# EAGLE board CT_schematic (EAGLE 7.6.0)

Size 100 x 80 mm. Coordinates in mm from the lower left corner, seen from the top.
Outline: 0,0 100,0 100,80 0,80 0,0
Copper layers (1*16): Top 0.035mm / dielectric 1.5mm / Bottom 0.035mm
Design rules "default": minimum track width 10mil, minimum drill 24mil, track to track 8mil, track to pad 8mil, pad to pad 8mil, via to via 8mil, smd to smd 8mil, copper to edge 40mil, drill to drill 8mil, minimum pad ring 10mil, minimum via ring 8mil, stop-mask expansion 4mil, vias tented up to drill 0mil, thermal gap 10mil

## Footprints (pad centres in the part's own frame; a part is rotated, then mirrored left to right if it is on the bottom)
C0603 = smd 0.8 x 0.8: 1 -0.762,0; 2 0.762,0
C0402 = smd 0.5 x 0.5: 1 -0.508,0; 2 0.508,0
C0805 = smd 1.2 x 1.3: 1 -1.016,0; 2 1.016,0
C1206 = smd 1.3 x 1.6: 1 -1.524,0; 2 1.524,0
L0603 = smd 0.8 x 0.8: 1 -0.762,0; 2 0.762,0
WE-HCI_7030/7040/7050 = smd 2.5 x 3: 1 -2.45,0; 2 2.45,0
R0603 = smd 0.8 x 0.8: 1 -0.762,0; 2 0.762,0
LQFP48 = smd 0.3 x 1.2: 1 -2.75,-4.25; 2 -2.25,-4.25; 3 -1.75,-4.25; 4 -1.25,-4.25; 5 -0.75,-4.25; 6 -0.25,-4.25; 7 0.25,-4.25; 8 0.75,-4.25; 9 1.25,-4.25; 10 1.75,-4.25; 11 2.25,-4.25; 12 2.75,-4.25; 25 2.75,4.25; 26 2.25,4.25; 27 1.75,4.25; 28 1.25,4.25; 29 0.75,4.25; 30 0.25,4.25; 31 -0.25,4.25; 32 -0.75,4.25; 33 -1.25,4.25; 34 -1.75,4.25; 35 -2.25,4.25; 36 -2.75,4.25 | smd 1.2 x 0.3: 13 4.25,-2.75; 14 4.25,-2.25; 15 4.25,-1.75; 16 4.25,-1.25; 17 4.25,-0.75; 18 4.25,-0.25; 19 4.25,0.25; 20 4.25,0.75; 21 4.25,1.25; 22 4.25,1.75; 23 4.25,2.25; 24 4.25,2.75; 37 -4.25,2.75; 38 -4.25,2.25; 39 -4.25,1.75; 40 -4.25,1.25; 41 -4.25,0.75; 42 -4.25,0.25; 43 -4.25,-0.25; 44 -4.25,-0.75; 45 -4.25,-1.25; 46 -4.25,-1.75; 47 -4.25,-2.25; 48 -4.25,-2.75
QFN-32 = smd 0.6 x 0.3: 1 -2.3,1.75; 2 -2.3,1.25; 3 -2.3,0.75; 4 -2.3,0.25; 5 -2.3,-0.25; 6 -2.3,-0.75; 7 -2.3,-1.25; 8 -2.3,-1.75; 17 2.3,-1.75; 18 2.3,-1.25; 19 2.3,-0.75; 20 2.3,-0.25; 21 2.3,0.25; 22 2.3,0.75; 23 2.3,1.25; 24 2.3,1.75 | smd 0.3 x 0.6: 9 -1.75,-2.3; 10 -1.25,-2.3; 11 -0.75,-2.3; 12 -0.25,-2.3; 13 0.25,-2.3; 14 0.75,-2.3; 15 1.25,-2.3; 16 1.75,-2.3; 25 1.75,2.3; 26 1.25,2.3; 27 0.75,2.3; 28 0.25,2.3; 29 -0.25,2.3; 30 -0.75,2.3; 31 -1.25,2.3; 32 -1.75,2.3 | smd 3.2 x 3.2: EXP 0,0
SJ-43515TS-SMT-TR = smd 2.2 x 3: 1 0.6,-7.4; 4 3.4,-7.4 | smd 3 x 3: 2 12.8,-7.4; 5 17,-3 | smd 2 x 3: 3 5.3,0; 6 2.5,0 | drill 1.8: P$7 4.5,-3.69; P$8 11.54,-3.69
WM-64PC = drill 0.6 pad 1: 1 -1,0.95; 2 -1,-0.95
ABLS-25.000MHZ-B2F-T = smd 5.6 x 2.8: 1 -3.81,0; 2 5.69,0
ASEK = smd 1.4 x 1: 1 -1.1,-0.8; 2 1.1,-0.8; 3 1.1,0.8; 4 -1.1,0.8
ASFL1 = smd 1.7 x 1.5: 1 -1.27,-1.1; 2 1.27,-1.1; 3 1.27,1.1; 4 -1.27,1.1
WSON-8 = smd 0.3 x 0.6: 1 -0.75,0; 2 0.05,0; 3 0.85,0; 4 1.65,0; 5 1.65,3.8; 6 0.85,3.8; 7 0.05,3.8; 8 -0.75,3.8 | smd 3 x 2.6: PAD 0.45,1.9
TSOT-23-5 = smd 1.3 x 0.62: 1 -1.31,0.95; 2 -1.31,0; 3 -1.31,-0.95; 4 1.31,-0.95; 5 1.31,0.95
DFN8_2X3MC = smd 0.813 x 0.305: 1 -1.398,0.75; 2 -1.398,0.25; 3 -1.398,-0.25; 4 -1.398,-0.75; 5 1.398,-0.75; 6 1.398,-0.25; 7 1.398,0.25; 8 1.398,0.75 | smd 1.753 x 1.549: 9 0,0
JST-2-SMD = smd 1 x 4.6: 1 -1,-3.7; 2 1,-3.7 | smd 1.6 x 3.4: NC1 -3.4,1.5; NC2 3.4,1.5
FCI_10118193-0001LF = smd 0.4 x 1.35: 1 -1.3,2.675; 2 -0.65,2.675; 3 0,2.675; 4 0.65,2.675; 5 1.3,2.675 | smd 1.6 x 1.4: 6 -3.2,2.45; 7 3.2,2.45 | smd 1.9 x 1.9: 8 -1.2,0; 9 1.2,0 | hole 0.5: -3.3,0; 3.3,0
SON-6 = smd 0.55 x 0.3: 1 -0.355,0.5 | smd 0.52 x 0.3: 2 -0.37,0; 3 -0.37,-0.5; 4 0.37,-0.5; 5 0.37,0; 6 0.37,0.5
SW_4-1437565-2 = smd 1.4 x 2.1: 1 -2.23,4.55; 2 -2.23,-4.55; 3 2.23,4.55; 4 2.23,-4.55
LGM67K-G1J2-24-Z = smd 0.8 x 1.4: A -2,0; C 0,0
NC7SZ125M5X = smd 1.3 x 0.7: 1 -1.3,0.95; 2 -1.3,0; 3 -1.3,-0.95; 4 1.3,-0.95; 5 1.3,0.95
DUMMY_PACKAGE_147 = drill 0.3: 1 0,-1; 2 1.5,-1; 3 3,-1

## Placement (x,y rotation side)
C1  1e-07  [C0603]  -38.1,66.04 0 top  (outside the outline)
C2  1e-07  [C0603]  -41.91,66.04 0 top  (outside the outline)
C3  1e-07  [C0603]  -45.72,66.04 0 top  (outside the outline)
C4  1e-07  [C0603]  -49.53,66.04 0 top  (outside the outline)
C5  4.7e-06  [C0603]  -34.29,66.04 0 top  (outside the outline)
C6  1e-07  [C0603]  -53.34,66.04 0 top  (outside the outline)
C7  1e-07  [C0603]  -57.15,66.04 0 top  (outside the outline)
C8  1e-08  [C0603]  -60.96,66.04 0 top  (outside the outline)
C9  1e-06  [C0603]  -64.77,66.04 0 top  (outside the outline)
C10  1e-11  [C0402]  -76.2,71.12 0 top  (outside the outline)
C11  1e-11  [C0402]  -15.24,76.2 0 top  (outside the outline)
C12  1e-06  [C0603]  -68.58,66.04 0 top  (outside the outline)
C13  1e-06  [C0603]  -72.39,66.04 0 top  (outside the outline)
C14  1e-06  [C0603]  -15.24,71.12 0 top  (outside the outline)
C15  1e-06  [C0603]  -19.05,71.12 0 top  (outside the outline)
C16  1e-06  [C0603]  -22.86,71.12 0 top  (outside the outline)
C17  1e-06  [C0603]  -26.67,71.12 0 top  (outside the outline)
C18  1e-06  [C0603]  -30.48,71.12 0 top  (outside the outline)
C19  1e-07  [C0402]  -19.05,76.2 0 top  (outside the outline)
C20  1e-07  [C0402]  -22.86,76.2 0 top  (outside the outline)
C21  1e-07  [C0402]  -26.67,76.2 0 top  (outside the outline)
C22  1e-07  [C0402]  -30.48,76.2 0 top  (outside the outline)
C23  1e-06  [C0603]  -34.29,71.12 0 top  (outside the outline)
C24  1e-08  [C0402]  -34.29,76.2 0 top  (outside the outline)
C25  1e-08  [C0402]  -38.1,76.2 0 top  (outside the outline)
C26  1e-08  [C0402]  -41.91,76.2 0 top  (outside the outline)
C27  1e-05  [C0805]  -21.59,59.69 0 top  (outside the outline)
C28  1e-05  [C0805]  -26.67,59.69 0 top  (outside the outline)
C29  1e-05  [C0805]  -31.75,59.69 0 top  (outside the outline)
C30  1e-05  [C0805]  -36.83,59.69 0 top  (outside the outline)
C31  1e-07  [C0402]  -45.72,76.2 0 top  (outside the outline)
C32  1e-05  [C1206]  -68.58,52.07 0 top  (outside the outline)
C33  1e-05  [C1206]  -74.93,52.07 0 top  (outside the outline)
C34  1e-08  [C0402]  -49.53,76.2 0 top  (outside the outline)
F1  240.0  [L0603]  -38.1,71.12 0 top  (outside the outline)
I1  2e-06  [WE-HCI_7030/7040/7050]  -45.72,21.59 0 top  (outside the outline)
R1  10000.0  [R0603]  -74.93,59.69 0 top  (outside the outline)
R2  1000.0  [R0603]  -41.91,71.12 0 top  (outside the outline)
R3  1600.5  [R0603]  -45.72,71.12 0 top  (outside the outline)
R4  4700.0  [R0603]  -49.53,71.12 0 top  (outside the outline)
R5  10000.0  [R0603]  -15.24,66.04 0 top  (outside the outline)
R6  1270.0  [R0603]  -53.34,71.12 0 top  (outside the outline)
R7  1270.0  [R0603]  -57.15,71.12 0 top  (outside the outline)
R8  100000.0  [R0603]  -54.61,59.69 0 top  (outside the outline)
R9  200.0  [R0603]  -60.96,71.12 0 top  (outside the outline)
R10  1000.0  [R0603]  -64.77,71.12 0 top  (outside the outline)
R11  220000.0  [R0603]  -59.69,59.69 0 top  (outside the outline)
R12  1000000.0  [R0603]  -49.53,59.69 0 top  (outside the outline)
R13  10000.0  [R0603]  -20.32,66.04 0 top  (outside the outline)
R14  10000.0  [R0603]  -25.4,66.04 0 top  (outside the outline)
R15  9100.0  [R0603]  -68.58,71.12 0 top  (outside the outline)
R16  680000.0  [R0603]  -64.77,59.69 0 top  (outside the outline)
R17  120000.0  [R0603]  -69.85,59.69 0 top  (outside the outline)
R18  2000.0  [R0603]  -72.39,71.12 0 top  (outside the outline)
R19  10000.0  [R0603]  -30.48,66.04 0 top  (outside the outline)
U1  STM32L051C6T6  [LQFP48]  -50.8,34.29 0 top  (outside the outline)
U2  SGTL5000XNAA3  [QFN-32]  -66.04,34.29 0 top  (outside the outline)
U3  SJ-43515TS-SMT-TR  [SJ-43515TS-SMT-TR]  -39.37,10.16 0 top  (outside the outline)
U4  SJ-43515TS-SMT-TR  [SJ-43515TS-SMT-TR]  -67.31,10.16 0 top  (outside the outline)
U5  SJ-43515TS-SMT-TR  [SJ-43515TS-SMT-TR]  -39.37,24.13 0 top  (outside the outline)
U6  WM-64PCT  [WM-64PC]  -35.56,34.29 0 top  (outside the outline)
U7  ABLS-25.000MHZ-B2F-T  [ABLS-25.000MHZ-B2F-T]  -45.72,53.34 0 top  (outside the outline)
U8  ASEK-32.768KHz-ECST  [ASEK]  -29.21,53.34 0 top  (outside the outline)
U9  ASFL-24.57MHZ-NCS  [ASFL1]  -48.26,44.45 0 top  (outside the outline)
U10  LP3878SDX-ADJ/NOPB  [WSON-8]  -30.48,43.18 0 top  (outside the outline)
U11  ltc3406es5  [TSOT-23-5]  -41.91,59.69 0 top  (outside the outline)
U12  MCP73831T-2ACI/MC  [DFN8_2X3MC]  -64.77,74.93 0 top  (outside the outline)
U13  S2B-PH-SM4-TB(LF)(SN)  [JST-2-SMD]  -22.86,35.56 0 top  (outside the outline)
U14  10118193-0001LF  [FCI_10118193-0001LF]  -57.15,43.18 0 top  (outside the outline)
U15  TPS3895ADRYR  [SON-6]  -58.42,74.93 0 top  (outside the outline)
U16  4-1437565-2  [SW_4-1437565-2]  -64.77,21.59 0 top  (outside the outline)
U17  Q65110A2395  [LGM67K-G1J2-24-Z]  -57.15,53.34 0 top  (outside the outline)
U18  nc7sz125m5x  [NC7SZ125M5X]  -15.24,59.69 0 top  (outside the outline)
U19  Dummy  [DUMMY_PACKAGE_147]  -55.88,76.2 0 top  (outside the outline)

## Library data of the parts
C1-C34 F1 I1 R1-R19 U1-U19 = circuit_tree

## Nets
CLK_CRYSTAL_U1_5: C10.1 U1.5 U7.1
CLK_CRYSTAL_U1_6: C11.1 U1.6 U7.2
CLK_U1_3: U1.3 U8.3
CLK_U2_21: U2.21 U9.3
GND: C1.2 C2.2 C3.2 C4.2 C5.2 C6.2 C7.2 C8.2 C9.2 C10.2 C11.2 C19.2 C20.2 C21.2 C22.2 C23.2 C24.2 C25.2 C26.2 C27.2 C28.2 C29.2 C30.1 C30.2 C31.2 C32.2 C33.2 C34.2 R2.2 R5.2 R7.2 R10.2 R11.2 R15.2 R17.2 R18.2 U1.8 U1.23 U1.35 U1.47 U2.1 U2.3 U2.7 U2.EXP U4.1 U5.1 U6.2 U8.2 U9.2 U10.3 U10.PAD U11.2 U12.6 U12.9 U13.2 U14.5 U14.6 U14.7 U14.8 U14.9 U15.2 U17.C U18.1 U18.3 U19.1
INPUT_USBPOWER_5V: C32.1 R19.2 U12.1 U12.2 U14.1
NET_U1_7: R4.1 U1.7 U18.4
NET_U1_9: C8.1 C9.1 F1.1 U1.9
NET_U1_44: R5.1 U1.44
NET_U1_45: R3.1 U1.45 U17.A
NET_U1_46: R1.1 U1.46 U16.3 U16.4
NET_U2_10: C22.1 U2.10
NET_U2_29: R6.1 U2.29
NET_U2_31: R7.1 U2.31
NET_U3_1: U2.4 U3.1
NET_U3_2: U2.2 U3.2
NET_U3_5: U2.6 U3.5
NET_U4_2: C13.1 U4.2
NET_U4_5: C12.1 U4.5
NET_U4_11: C13.2
NET_U4_12: C12.2
NET_U5_2: C15.1 C16.1 U5.2
NET_U5_5: C14.1 U5.5
NET_U5_13: C15.2 C16.2
NET_U5_14: C14.2
NET_U6_1: C17.1 C18.1 C23.1 U2.16 U6.1
NET_U6_15: C17.2 C18.2
NET_U10_1: C26.1 U10.1
NET_U10_6: R9.2 R10.1 U10.6
NET_U10_8: R8.1 U10.8
NET_U11_1: U11.1
NET_U11_3: I1.1 U11.3
NET_U11_5: R11.1 R12.1 U11.5
NET_U11_ATNET_3: I1.2 R12.2
NET_U12_5: R19.1 U12.5
NET_U12_8: R18.1 U12.8
NET_U15_1: R14.1 R15.1 U15.1
NET_U15_3: R16.2 R17.1 U15.3
NET_U15_4: R13.1 U15.4 U18.2
NET_U16_1: R2.1 U16.1 U16.2
PROC_I2S2_CK: U1.26 U2.24
PROC_I2S2_SD: U1.28 U2.26
PROC_I2S2_WS: U1.25 U2.23
PROC_TIM2_CH3: U1.12 U19.3
PROC_TIM2_CH4: U1.13 U19.2
VCC_S1_3V7: C27.1 C29.1 C33.1 R8.2 U10.4 U11.4 U12.3 U12.4 U13.1
VCC_TIER1_1V2: C19.1 C28.1 R9.1 U2.30 U10.5
VCC_TIER1_3V3: C1.1 C2.1 C3.1 C4.1 C5.1 C6.1 C7.1 C20.1 C21.1 C24.1 C25.1 C30.2 C31.1 C34.1 F1.2 I1.2 R1.2 R3.2 R4.2 R6.2 R12.2 R13.2 R14.2 R16.1 U1.1 U1.24 U1.36 U1.48 U2.5 U2.20 U8.4 U9.4 U15.6 U18.5

## Tracks (layer width: path | path; a pad name or v marks a point on that pad's centre or on a via)
CLK_CRYSTAL_U1_5  (2 unrouted)
CLK_CRYSTAL_U1_6  (2 unrouted)
CLK_U1_3  (1 unrouted)
CLK_U2_21  (1 unrouted)
GND  (64 unrouted)
INPUT_USBPOWER_5V  (4 unrouted)
NET_U1_7  (2 unrouted)
NET_U1_9  (3 unrouted)
NET_U1_44  (1 unrouted)
NET_U1_45  (2 unrouted)
NET_U1_46  (3 unrouted)
NET_U2_10  (1 unrouted)
NET_U2_29  (1 unrouted)
NET_U2_31  (1 unrouted)
NET_U3_1  (1 unrouted)
NET_U3_2  (1 unrouted)
NET_U3_5  (1 unrouted)
NET_U4_2  (1 unrouted)
NET_U4_5  (1 unrouted)
NET_U5_2  (2 unrouted)
NET_U5_5  (1 unrouted)
NET_U5_13  (1 unrouted)
NET_U6_1  (4 unrouted)
NET_U6_15  (1 unrouted)
NET_U10_1  (1 unrouted)
NET_U10_6  (2 unrouted)
NET_U10_8  (1 unrouted)
NET_U11_3  (1 unrouted)
NET_U11_5  (2 unrouted)
NET_U11_ATNET_3  (1 unrouted)
NET_U12_5  (1 unrouted)
NET_U12_8  (1 unrouted)
NET_U15_1  (2 unrouted)
NET_U15_3  (2 unrouted)
NET_U15_4  (2 unrouted)
NET_U16_1  (2 unrouted)
PROC_I2S2_CK  (1 unrouted)
PROC_I2S2_SD  (1 unrouted)
PROC_I2S2_WS  (1 unrouted)
PROC_TIM2_CH3  (1 unrouted)
PROC_TIM2_CH4  (1 unrouted)
VCC_S1_3V7  (8 unrouted)
VCC_TIER1_1V2  (4 unrouted)
VCC_TIER1_3V3  (33 unrouted)